# EAGLE board DLPG PANEL (EAGLE 7.7.0)
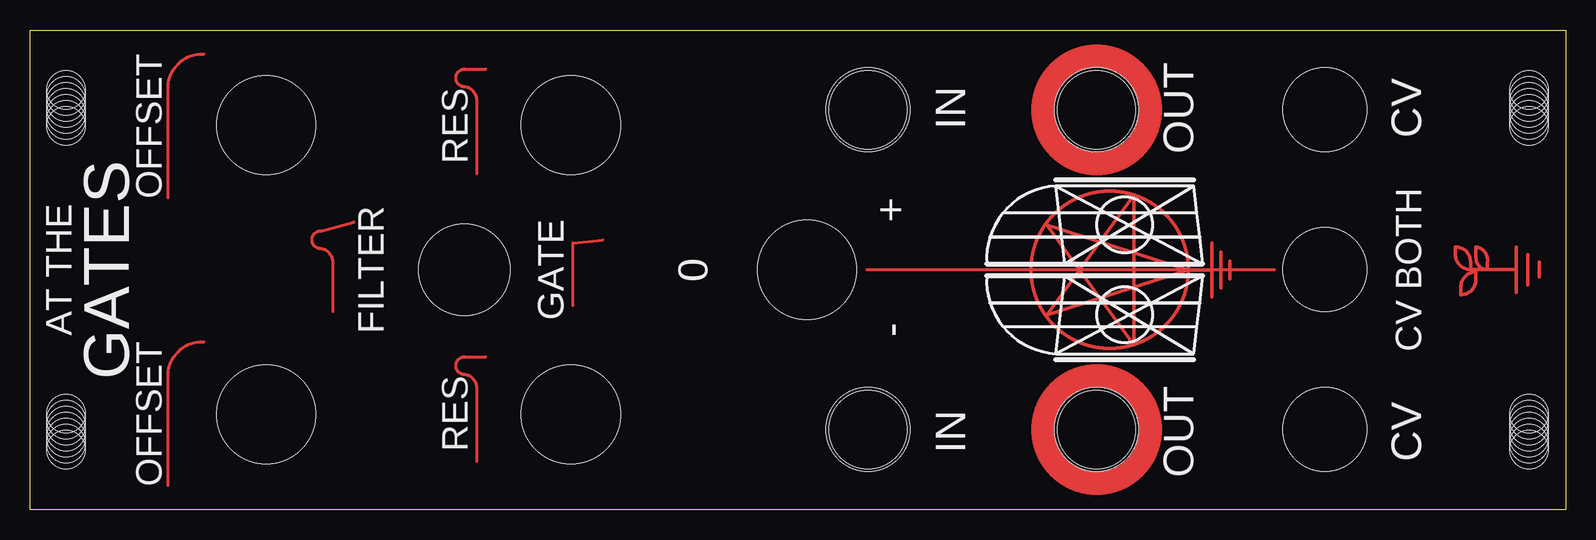
[diagram p0: board, top side]
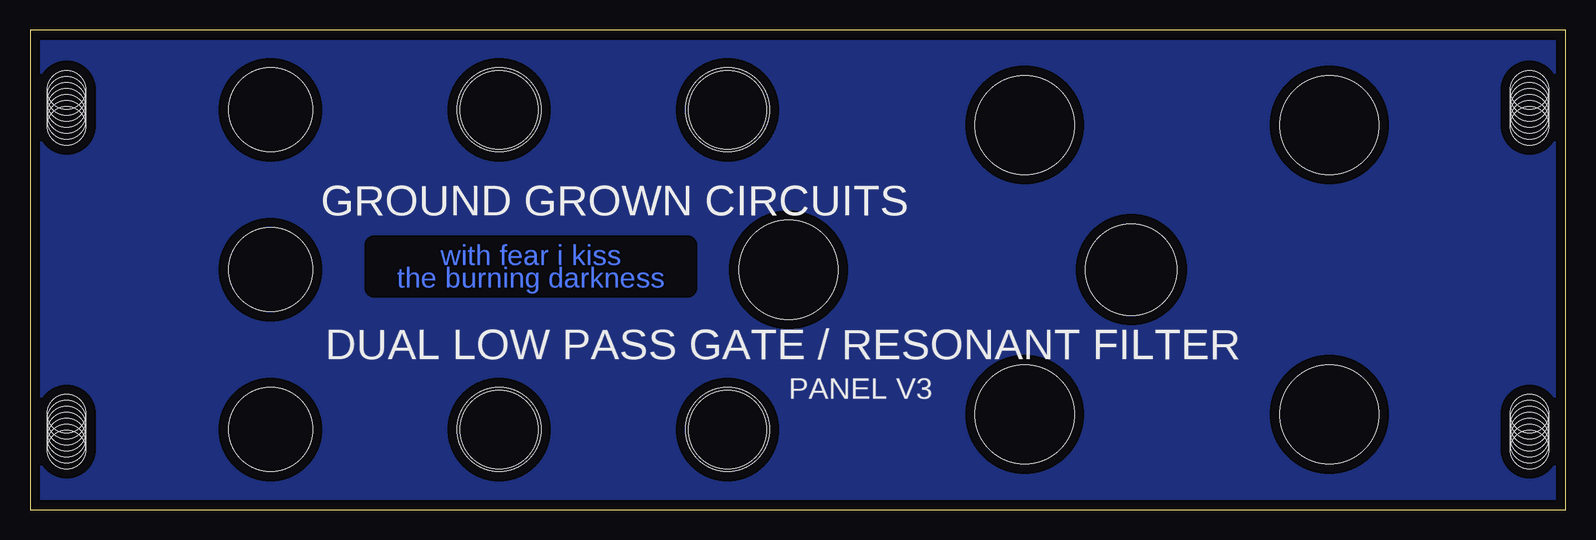
[diagram p1: board, bottom side, seen from below]

Size 128 x 40 mm. Coordinates in mm from the lower left corner, seen from the top.
Outline: 0,40 128,40 128,0 0,0 0,40
Copper layers (1*16): Top 0.035mm / dielectric 1.5mm / Bottom 0.035mm
Design rules "SparkFun": minimum track width 8mil, minimum drill 20mil, track to track 8mil, track to pad 8mil, pad to pad 8mil, via to via 8mil, smd to smd 8mil, copper to edge 10mil, drill to drill 8mil, minimum pad ring 12mil, minimum via ring 10mil, stop-mask expansion 4mil, vias tented up to drill 25mil, thermal gap 10mil
Holes 8.26 mm at 19.68,32.07 19.68,7.94 45.09,7.94 45.09,32.07 64.77,20
Holes 7.62 mm at 36.2,20
Holes 6.99 mm at 69.85,33.34 88.9,33.34 69.85,6.67 88.9,6.67 107.95,33.34 107.95,20 107.95,6.67

## Footprints (pad centres in the part's own frame; a part is rotated, then mirrored left to right if it is on the bottom)
JACK_DRILL = hole 6.5: 0,0
JACK_DRILL_COPPER = hole 6.5: 0,0
MOUNT_DRILL = hole 3.2: 3,8; 3,7.5; 3,7; 3,6.5; 3,6; 3,5.5; 3,5

## Placement (x,y rotation side)
E$1  [LOGO_SMALL_COPPER]  123.83,20 90 top
E$2  [JACK_DRILL]  69.85,33.34 0 top
E$3  [JACK_DRILL_COPPER]  88.9,33.34 0 top
E$4  [JACK_DRILL]  69.85,6.67 0 top
E$5  [JACK_DRILL_COPPER]  88.9,6.67 0 top
E$6  [MOUNT_DRILL]  0,0 0 top
E$7  [MOUNT_DRILL]  127.95,40.01 180 top
E$8  [MOUNT_DRILL]  127.95,0 0 bottom
E$9  [MOUNT_DRILL]  0,40.01 180 bottom

## Library data of the parts
E$1-E$9 = GroundGrownCircuits

## Tracks (layer width: path | path; a pad name or v marks a point on that pad's centre or on a via)
S$1
  pour Bottom (isolate 0.813): 0,0 0,40 128,40 128,0
S$2
  Top 0.254: 11.5,2 11.5,11.25 arc-90 14.5,14
S$3
  Top 0.254: 11.5,26 11.5,35.25 arc-90 14.5,38
S$4
  Top 0.254: 37.25,4 37.25,10 arc90 36.25,11.25 arc-90 35.5,12 arc-90 36.25,12.75 38,12.75
S$5
  Top 0.254: 37.25,28 37.25,34 arc90 36.25,35.25 arc-90 35.5,36 arc-90 36.25,36.75 38,36.75
S$6
  Top 0.254: 25.25,16.5 25.25,20.5 arc90 24.25,21.75 arc-90 23.5,22.5 arc-90 24.25,23.25 27,24
S$7
  Top 0.254: 45.25,17 45.25,22.25 47.75,22.5
S$8
  Top 0.254: 103.75,20 69.75,20
S$9
  Top 0.305: 96.5,20 84.75,23.75 92,13.75 92,26.25 84.75,16.25 96.5,20 | 96.5,20 98.5,20
S$10
  Top 0.305: 98.5,22.25 98.5,17.75
S$11
  Top 0.305: 99.25,21.5 99.25,18.5
S$12
  Top 0.305: 100,20.75 100,19.25
(copper drawn outside any net)
  shapes: Top circle x1

## Text on the board
Bottom: with fear i kiss / the burning darkness
tPlace: IN | OUT | CV | OFFSET | RES | + | AT THE | GATES | FILTER | GATE | 0 | CV BOTH | - | OFFSET | RES | IN | OUT | CV
bPlace: GROUND GROWN CIRCUITS | DUAL LOW PASS GATE / RESONANT FILTER | PANEL V3